# Altium PCB DesignChallenge1.PcbDoc
Units mil, origin at the board's own origin, x right, y up, seen from the top; angles counter-clockwise.
Board outline 3000 x 2000 mil, 2 copper layers (Top Layer, Bottom Layer); 21 components, 17 nets, 104 pads, 4 vias.
Unrouted connection lines stored in the file: 47.
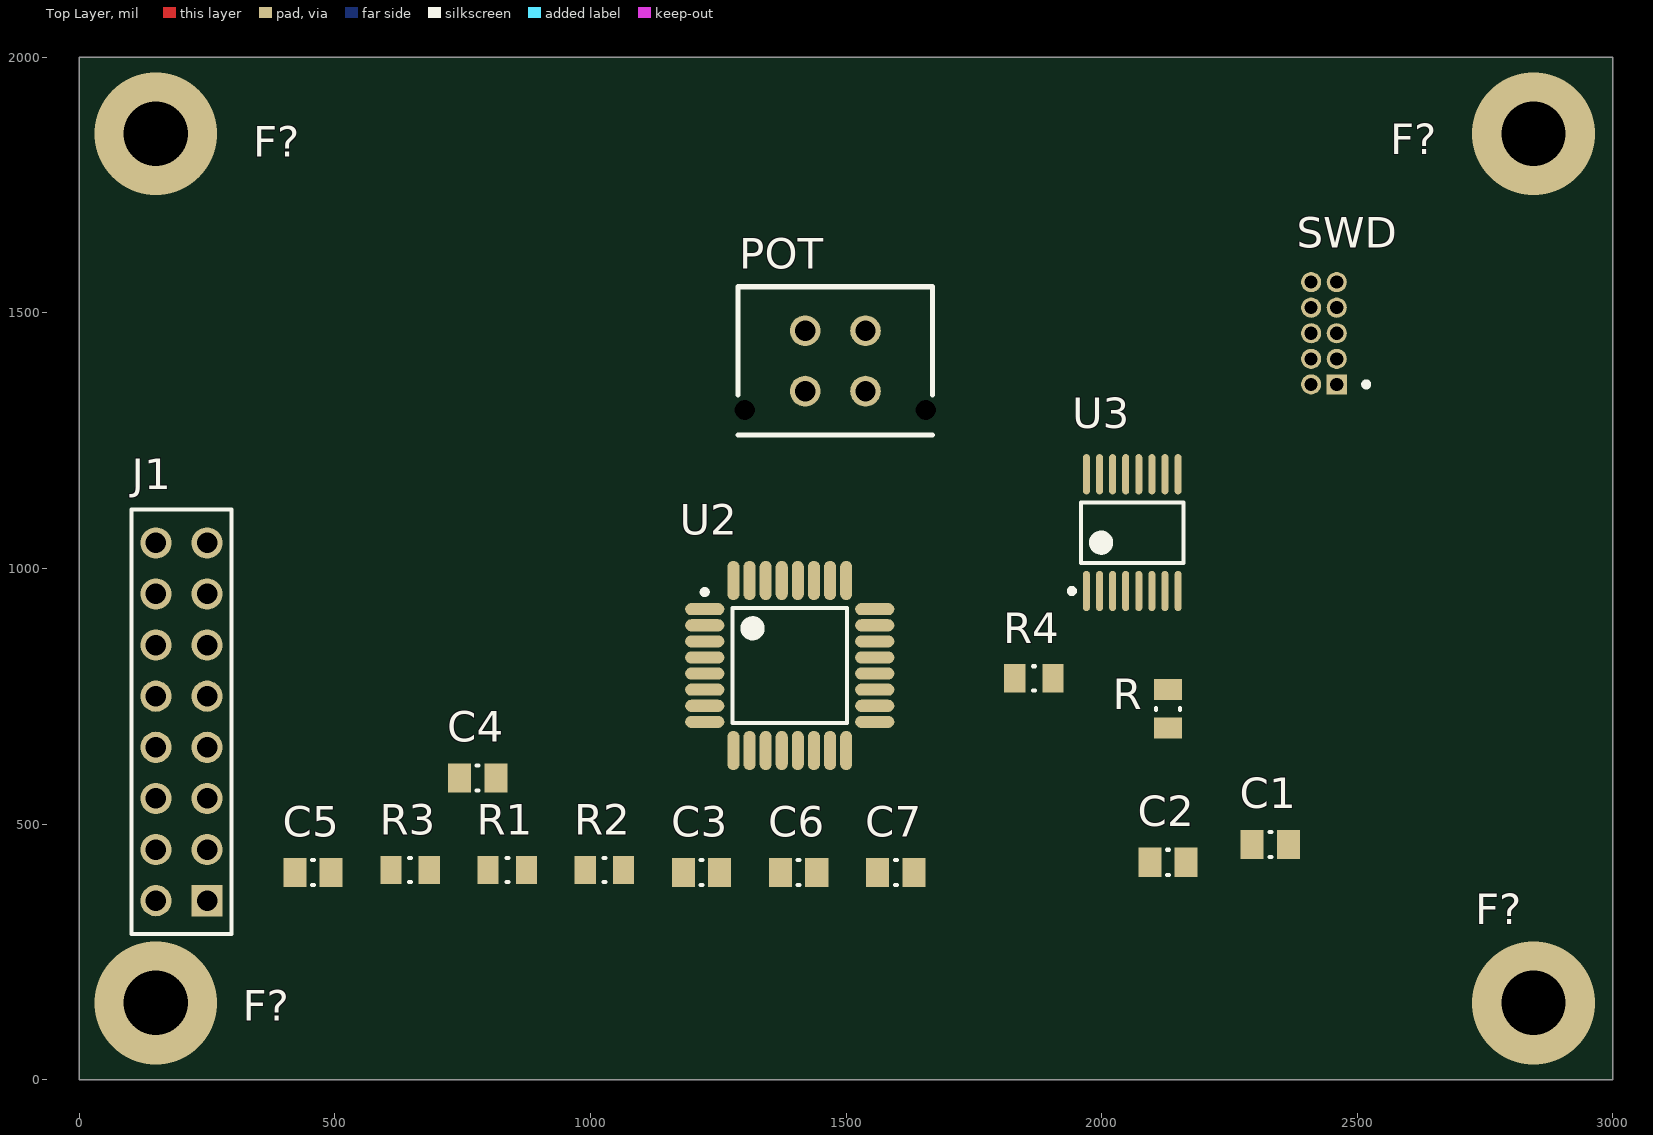
[diagram p0: Top Layer view]
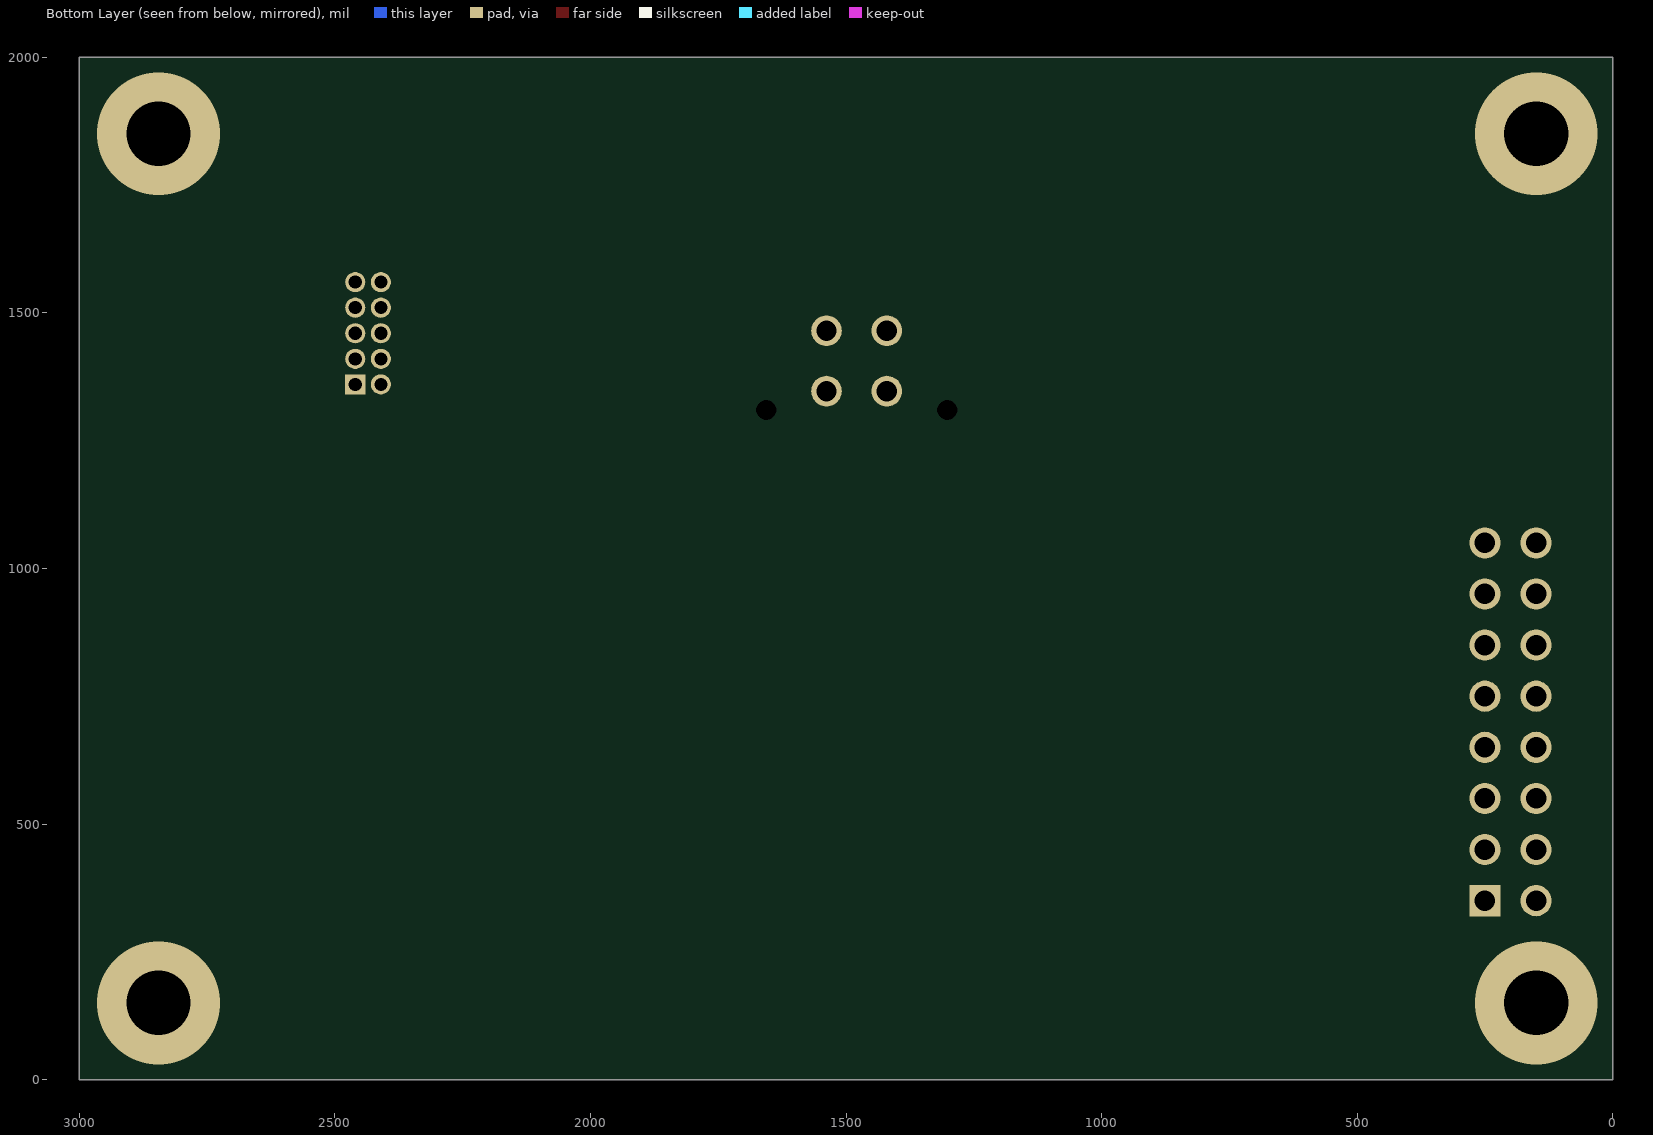
[diagram p1: Bottom Layer view, seen from below]

## Layer stack, top to bottom
Top Solder: solder mask 0.4, Solder Resist, Dk 3.5
Top Layer: signal copper 1.4
Dielectric 1: dielectric 12.6, FR-4, Dk 4.8
Bottom Layer: signal copper 1.4
Bottom Solder: solder mask 0.4, Solder Resist, Dk 3.5

## Board outline
0,0 3000,0 3000,2000 0,2000

## Design rules (kind name [scope] priority, off if disabled: settings)
Clearance [All] p1: gap=10 ignorepadtopadclearanceinfootprint=FALSE except(0: Arc-Hole Track-Hole SMDPad-Hole THPad-Hole Via-Hole Fill-Hole Poly-Hole Region-Hole Text-Hole)
PolygonConnect [All] p1: connectstyle=Relief reliefconductorwidth=10 reliefentries=4 polygonreliefangle="90 Angle" airgapwidth=10
RoutingVias [All] p1: holewidth=28 width=50 viastyle="Through Hole" minholewidth=28 minwidth=50 maxholewidth=28 maxwidth=50
SolderMaskExpansion [All] p1: expansion=4
Width [All] p1: maxlimit=10 minlimit=10 preferedwidth=10
30 further rules are at their usual default settings.

## Components (designator, comment, footprint, x,y, rotation, side; value= is the part's Value field where it differs from the comment)
C1 "0.1 uF" CAPC0805(2012)145_N 2330,460 r0 top value=470pF
C2 "0.1 uF" CAPC0805(2012)145_N 2130,425 r0 top value=470pF
C3 "0.1 uF" CAPC0805(2012)145_N 1217.4,405 r0 top value=470pF
C4 "1 uF" CAPC0805(2012)145_N 779.57,590 r0 top value=470pF
C5 "1 uF" CAPC0805(2012)145_N 457.4,405 r0 top value=470pF
C6 "0.1 uF" CAPC0805(2012)145_N 1407.4,405 r0 top value=470pF
C7 "0.1 uF" CAPC0805(2012)145_N 1597.4,405 r0 top value=470pF
F? "Screw Hole" "Screw Hole" 2845,150 r0 top
F? "Screw Hole" "Screw Hole" 150,1850 r0 top
F? "Screw Hole" "Screw Hole" 2845,1850 r0 top
F? "Screw Hole" "Screw Hole" 150,150 r0 top
J1 "SSQ-108-02-G-D" SMTC-SSQ-108-02-X-D 150,350 r90 top
POT "Molex Micro" 0430450427 1479.06,1405.94 r0 top
R "5" RESC0805(2012)_N 2130,725.35 r90 top value="160.00 Ohm"
R1 "2k" RESC0805(2012)_N 837.4,410 r0 top value="160.00 Ohm"
R2 "2k" RESC0805(2012)_N 1027.4,410 r0 top value="160.00 Ohm"
R3 "5" RESC0805(2012)_N 647.4,410 r0 top value="160.00 Ohm"
R4 "120" RESC0805(2012)_N 1867.6,785 r0 top value="160.00 Ohm"
SWD ".05\" 10 pin" PCE-FH127H432-10-SNGRH-2.4 2435,1460 r90 top
U2 "STM32F303K8T6" STM-LQFP32_M 1390,810 r0 top
U3 "" TI-PW16_M 2060,1070 r90 top

## Footprints (in the part's own frame and the unit in brackets; to place one, negate y for a bottom-side part, rotate by r counter-clockwise, add the part's x,y. Pads: shape width x height; smd on the part's side, far side on the other; paste and mask are expansions set on the pad)
0430450427 [mil] "Molex micro-fit 3.0 4 pos"
  round 60 hole 40: 1(-59.06,59.06) 2(-59.06,-59.06) 3(59.06,59.06) 4(59.06,-59.06)
  round 0 hole 40 unplated: 7(177.17,-96.06) ""(-177.17,-96.06)
  silkscreen extent -190,-145 190,145
CAPC0805(2012)145_N [mm] "Chip Capacitor, Body 2.0x1.2mm, Height 1.45mm, IPC Medium Density"
  rect 1.15x1.45 smd: 1(-0.9,0) 2(0.9,0)
  silkscreen extent -0.05,-0.62 0.05,0.63, body extent -1.1,-0.72 1.1,0.73, height 1.45
PCE-FH127H432-10-SNGRH-2.4 [mm] "Female Header, Pitch 1.27mm, 2x5 Position, Height 4.3mm, Tail Length 2.4mm"
  rect 1x1 hole 0.65: 1(-2.54,-0.635)
  round 1 hole 0.65: 2(-2.54,0.635) 3(-1.27,-0.635) 4(-1.27,0.635) 5(0,-0.635) 6(0,0.635) 7(1.27,-0.635) 8(1.27,0.635) 9(2.54,-0.635) 10(2.54,0.635)
  silkscreen extent -2.66,-2.22 -2.42,-1.98, body extent -3.38,-1.5 3.38,1.5, height 4.3
RESC0805(2012)_N [mm] "Chip Resistor, Body 2.0x1.3mm, IPC Medium Density"
  rect 1.05x1.4 smd: 1(-0.95,0) 2(0.95,0)
  silkscreen extent -0.05,-0.6 0.05,0.6, body extent -1.1,-0.67 1.1,0.68, height 0.7
"Screw Hole" [mil]
SMTC-SSQ-108-02-X-D [mm] "SQ Post Socket, 2x8 Pins, Vertical, 2.54mm Pitch, Female"
  rect 1.55x1.55 hole 1.02: 1(0,-2.54)
  round 1.55 hole 1.02: 2(0,0) 3(2.54,-2.54) 4(2.54,0) 5(5.08,-2.54) 6(5.08,0) 7(7.62,-2.54) 8(7.62,0) 9(10.16,-2.54) 10(10.16,0) 11(12.7,-2.54) 12(12.7,0) 13(15.24,-2.54) 14(15.24,0) 15(17.78,-2.54) 16(17.78,0)
  silkscreen extent -1.65,-3.74 19.43,1.2, body extent -1.52,-3.75 19.3,1.21, height 8.51
STM-LQFP32_M [mm] "QFP, 32-Leads, Body 7x7mm, Pitch 0.8mm, IPC Low Density"
  oval 1.95x0.6 smd: 1(-4.225,2.8) 2(-4.225,2) 3(-4.225,1.2) 4(-4.225,0.4) 5(-4.225,-0.4) 6(-4.225,-1.2) 7(-4.225,-2) 8(-4.225,-2.8) 17(4.225,-2.8) 18(4.225,-2) 19(4.225,-1.2) 20(4.225,-0.4) 21(4.225,0.4) 22(4.225,1.2) 23(4.225,2) 24(4.225,2.8)
  oval 0.6x1.95 smd: 9(-2.8,-4.225) 10(-2,-4.225) 11(-1.2,-4.225) 12(-0.4,-4.225) 13(0.4,-4.225) 14(1.2,-4.225) 15(2,-4.225) 16(2.8,-4.225) 25(2.8,4.225) 26(2,4.225) 27(1.2,4.225) 28(0.4,4.225) 29(-0.4,4.225) 30(-1.2,4.225) 31(-2,4.225) 32(-2.8,4.225)
  silkscreen extent -4.35,-2.85 2.85,3.77, body extent -3.5,-3.5 3.5,3.5, height 1.6
TI-PW16_M [mm] "SOP, 16-Leads, Body 5x4.4mm, Pitch 0.65mm, IPC Low Density"
  oval 2x0.35 smd: 1(-2.9,2.275) 2(-2.9,1.625) 3(-2.9,0.975) 4(-2.9,0.325) 5(-2.9,-0.325) 6(-2.9,-0.975) 7(-2.9,-1.625) 8(-2.9,-2.275) 9(2.9,-2.275) 10(2.9,-1.625) 11(2.9,-0.975) 12(2.9,-0.325) 13(2.9,0.325) 14(2.9,0.975) 15(2.9,1.625) 16(2.9,2.275)
  silkscreen extent -3.02,-2.55 1.5,3.12, body extent -2.25,-2.55 2.25,2.55, height 1.2

## Part data
C1 C2 C3 C4 C5 C6 C7: library part CMP-1036-02677-1, "CAP 470pF 100V ±2% 0805 (2012 Metric) Thickness 1.45mm SMD", Case-EIA=0805, Case-Metric=2012, Rated Voltage="100 V", Tolerance=±2%, Max Thickness="1.45 mm", Technology=SMT
F? F? F? F?: "Add 4 of these to your design for screw hole mounting"
J1: library part CMP-1023-00300-1, "SQ Post Socket, Through-hole, Vertical, -55 to 125 degC, 2.54 mm Pitch, 16-Pin, Female, RoHS", Manufacturer=Samtec, Temperature Range="-55 to 125 degC", ComponentLink1Description="Manufacturer URL", ComponentLink1URL=http://www.samtec.com, ComponentLink2Description=Datasheet, ComponentLink2URL=http://www.samtec.com/documents/webfiles/pdf/SSQ_TH.PDF, ComponentLink3Description="Package Specification", ComponentLink3URL=http://www.samtec.com/documents/webfiles/cpdf/SSQ-1XX-XX-XXX-X-XX-XXX-XX-X-MKT.pdf, DatasheetVersion=F-214, Mounting Technology=Through-hole, Orientation=Vertical, PackageDescription="Assembly, Socket Strip .025[0.64] SQ Tail", PackageReference=SSQ-108-02-X-D, PackageVersion="BD, 6/1987", PartNumber=SSQ-108-02-G-D, Pitch="2.54 mm", RoHS=True
POT: library part "Molex micro-fit 4-pin (Single row schematic)", "Molex micro-fit 3.0 dual row header. P/N 0430450427"
R R1 R2 R3 R4: library part CMP-1013-00418-1, "160R 0.125W 1% 0805 (2012 Metric)  SMD", Case-EIA=0805, Case-Metric=2012, Power="0.125 W", Tolerance="1 %", Technology=SMT
SWD: library part CMP-0594-00001-1, "Female Header, Pitch 1.27 mm, 2x5 Position, Height 4.3 mm, Tail Length 2.4 mm", Current Rating="2 Amps", Dielectric Withstaanding="AC 500 V", Insulator resistance (Min.)="5000 Megohms", Manufacturer="Pinchao Electronic", Operating Temperature="-40 to 105 degC", PartNumber=FH127H432-10-SNGRH-2.4, ComponentLink1Description="Manufacturer URL", ComponentLink1URL=http://www.suzhoupinchao.com/, Connector Type="Female Header", Insulator Material=NY-6T, Mounting Technology="Through Hole", No. of positions=10, No. of Rows=2, PackageDescription="Female Header, Pitch 1.27 mm, 2x5 Position, Height 4.3 mm, Tail Length 2.4 mm", PackageReference=FH127H432-10-SNGRH-2.4, Pitch="1.27 mm", Plating="Gold Flash"
U2: library part CMP-0537-00040-1, "ARM Cortex-M4 32-bit MCU, 64 KB Flash, 16 KB Internal RAM, 25 I/Os, 32-Pin LQFP, -40 to 85 degC, Tray", I/Os (High Current)=25, Operating Frequency(F) (Processor speed) (MHz)=72, Package Description="32-Pin Low Profile Quad Flat Package, 7 x 7 mm Body, 0.8 mm Pitch", Package Reference=LQFP32, Supply Voltage(Vcc) min (V)=2, ComponentLink1Description="Manufacturer URL", ComponentLink1URL=http://www.st.com/, ComponentLink2Description=Datasheet, ComponentLink2URL=http://www.st.com/st-web-ui/static/active/en/resource/technical/document/datasheet/DM00092070.pdf, Core="ARM Cortex-M4", D/A Converter=3, DatasheetVersion="Rev. 4", FLASH Size (Prog) (kB)=64, Internal RAM Size (kB)=16, Mounting Technology="Surface Mount", Packing=Tray
U3: library part CMP-0003-00799-1, "12-Bit 50 kSPS ADC I2C Low Power 8-Channel Multiplexer Internal 2.5 V Reference, -40 to 85 degC, 16-pin SOP (PW16), Green (RoHS & no Sb/Br)", Analog Voltage AV/DD(Max)(V)=5.25, Analog Voltage AV/DD(Min)(V)=2.7, Manufacturer="Texas Instruments", PartNumber=ADS7828EB/250, # Input Channels=8, Architecture=SAR, Code_JEDEC=MO-153, ComponentLink1Description="Manufacturer URL", ComponentLink1URL=http://www.ti.com/, ComponentLink2Description=Datasheet, ComponentLink2URL=http://www.ti.com/general/docs/lit/getliterature.tsp?genericPartNumber=ADS7828&fileType=pdf, ComponentLink3Description="Package Specification", ComponentLink3URL=http://www.ti.com/lit/ml/mpds361/mpds361.pdf, ComponentLink4Description="Better Datasheet", ComponentLink4URL=http://www.ti.com/lit/ds/symlink/ads7828-q1.pdf, DatasheetVersion=SBAS181C, Digital Supply(Max)(V)=5.25, Digital Supply(Min)(V)=2.7, Eco-Plan="Green (RoHS & no Sb/Br)", INL(Max)(+/-LSB)=1, Interface="Serial I2C", Mounting Technology="Surface Mount", PackageDescription="16-Pin Plastic Small Outline, Body 5 x 4.4 mm, Pitch 0.65 mm", PackageReference=PW16, PackageVersion="4040064-4/G, 02/2011", Resolution(Bits)=12, Sample Rate (max)(SPS)=50k, SFDR(dB)=86, SINAD(dB)=71, SNR(dB)=72, SubFamily="Precision ADC (<=10MSPS)"

## Via types
v1: diameter 240, hole 126, Top Layer to Bottom Layer, 4 vias

## Nets (pads, with @x,y where several pads share a name; then routed paths per layer and width w, separated by ;. In a path a pad name is that pad's centre, name@x,y a point inside that pad or via, vN(x,y) a via of type N, cw(c..) or ccw(c..) an arc to the next point about the centre after c; other vN are vias at no path point)
CANH: J1.3
CANL: J1.4 R4.2
GND: C1.1 C2.1 C3.2 C4.1 C5.1 C6.1 C7.1 J1.6 J1.8 J1.10 J1.12 J1.14 J1.16 POT.1 SWD.3 SWD.5 SWD.9 U2.16 U2.32 U3.9 U3.12 U3.13
NetC3_1: C3.1 U3.10
NetC5_2: C5.2 R3.1 U3.16
NetJ2_2: R4.1
NetJ?_2: R.1
NetPOT_3: POT.3 U3.1
NetR_2: R.2 U2.31
NRST: C2.2 SWD.10 U2.4
RX: U2.9
SCL: R2.1 U2.19 U3.14
SDA: R1.1 U2.20 U3.15
SWDCLK: SWD.4 U2.24
SWDIO: SWD.2 U2.23
TX: U2.8
VCC: C1.2 C4.2 C6.2 C7.2 J1.2 POT.2 R1.2 R2.2 R3.2 SWD.1 U2.1 U2.5 U2.17
pads on no net: J1.1 J1.5 J1.7 J1.9 J1.11 J1.13 J1.15 POT. POT.4 POT.7 SWD.6 SWD.7 SWD.8 U2.2 U2.3 U2.6 U2.7 U2.10 U2.11 U2.12 U2.13 U2.14 U2.15 U2.18 U2.21 U2.22 U2.25 U2.26 U2.27 U2.28 U2.29 U2.30 U3.2 U3.3 U3.4 U3.5 U3.6 U3.7 U3.8 U3.11
copper on no net:
  other v1: 150,150 2845,150 150,1850 2845,1850